# Altium PCB hat_template 2021V3.PcbDoc (part 2 of 2)
Units mm, origin at the board's own origin, x right, y up, seen from the top; angles counter-clockwise.
Board outline 64 x 85 mm, 4 copper layers (Top Side, Ground Plane, Power Plane, Bottom Side), stack 0.844 mm thick; 83 components, 57 nets, 300 pads, 72 vias.
Unrouted connection lines stored in the file: 1.
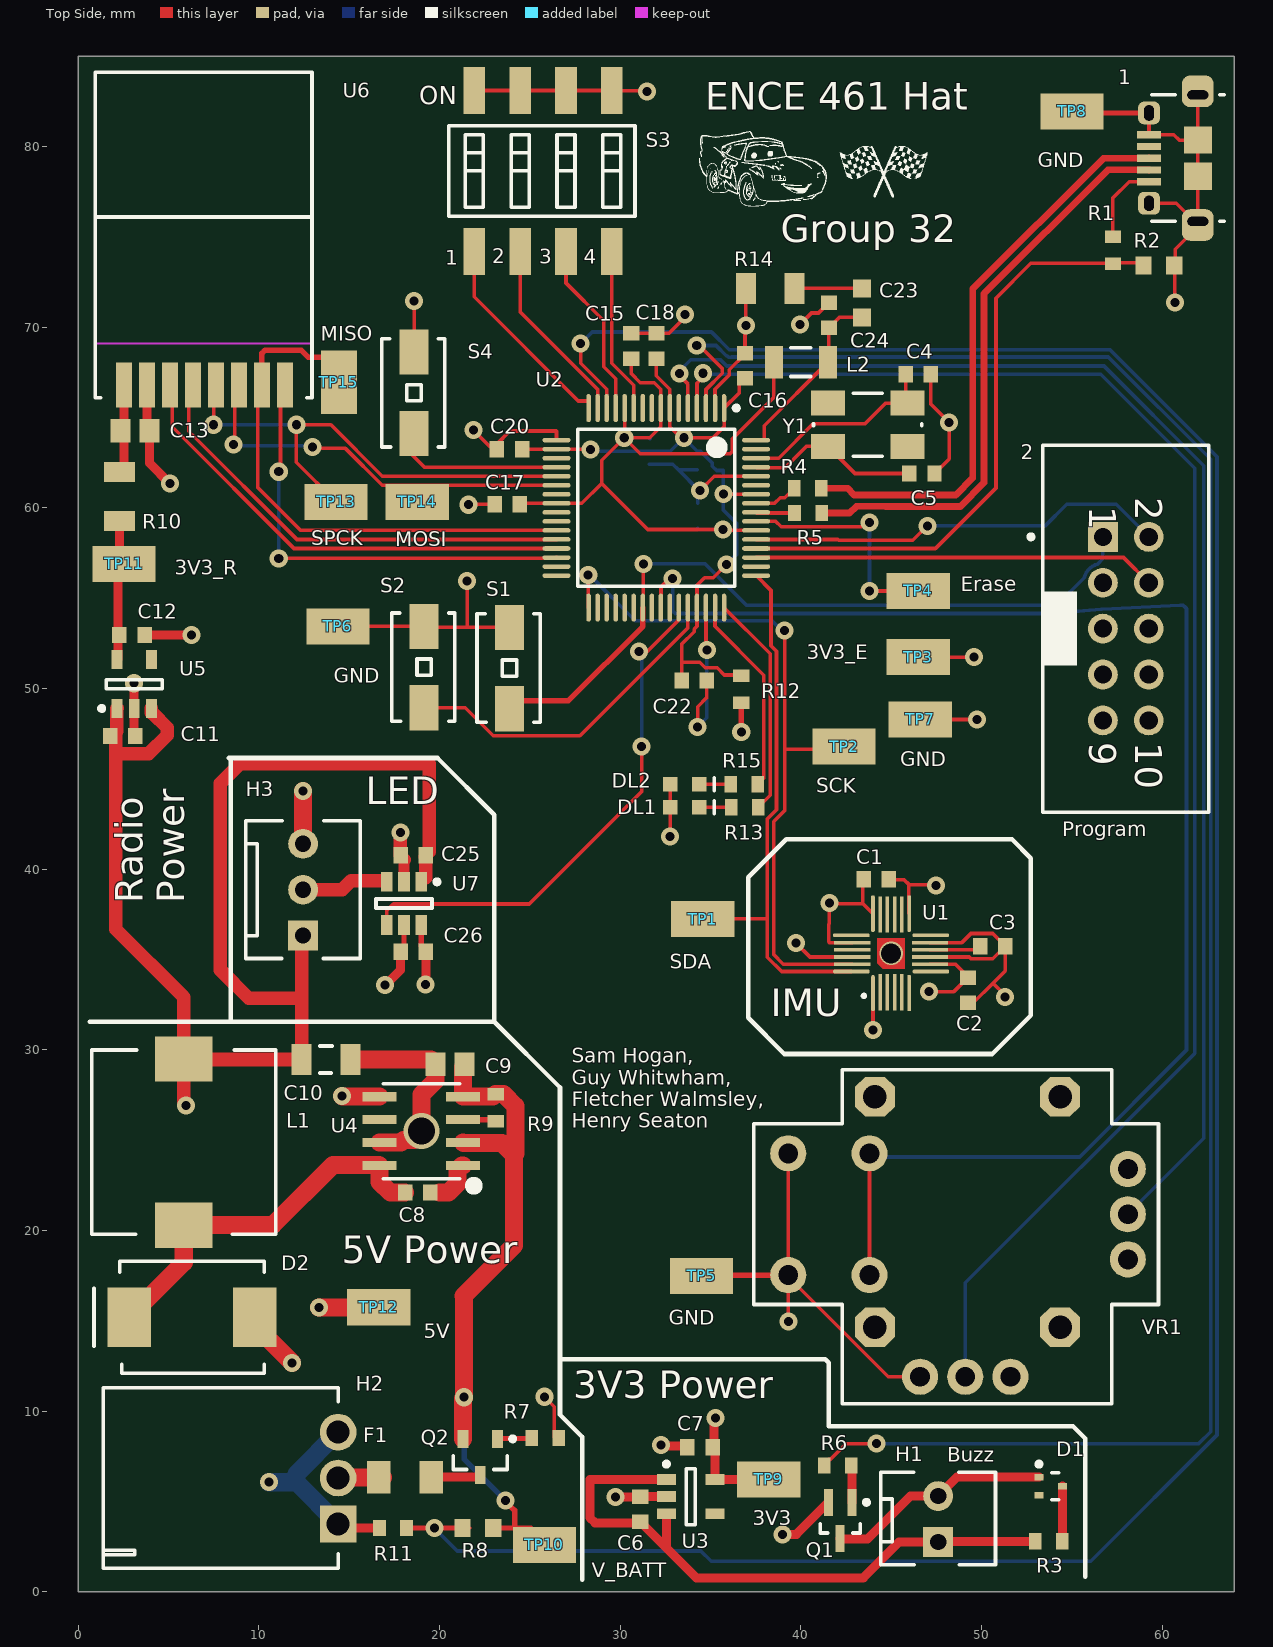
[diagram p0: Top Side view]

## Silkscreen, mask and mechanical layers (free items; w line width, h text height) (continued)
Top Overlay: (continued)
  drawing of 145 lines, arcs and shapes, not listed
  text "ENCE 461 Hat" at 34.696,82.042 h1.52
  text "Group 32" at 38.887,74.701 h1.52
  text "LED" at 15.926,43.586 h1.52
  text "Radio / Power" at 5.867,38.1 h1.52 r90
  text "IMU" at 38.329,31.852 h1.52
  text "Sam Hogan,  / Guy Whitwham,  / Fletcher Walmsley, / Henry Seaton" at 27.33,25.679 h0.8
  text "5V Power" at 14.58,18.186 h1.52
  text "3V3 Power" at 27.407,10.719 h1.52
Board Outline:
  lines w0.2: -0.2,0.1 -0.2,85.1 ; 0,0 64,0 64,85 0,85

## Dimensions
64,86 to 0,86 on Mechanical 1
65,85 to 65,0 on Mechanical 1

## Text inside footprints (layer, text, board x,y; h text height)
1: Mechanical 1 "PCB Edge" at 64.243,77.207 h0.52 r90
2: Top Overlay "9" at 55.968,47.035 h1.5 r270; Top Overlay "10" at 58.508,47.035 h1.5 r270; Top Overlay "1" at 55.968,60.094 h1.5 r270
S3: Top Overlay "4" at 27.995,73.525 h0.8; Top Overlay "3" at 25.52,73.5 h0.8; Top Overlay "2" at 22.92,73.55 h0.8; Top Overlay "1" at 20.32,73.45 h0.8; Top Overlay "ON" at 18.872,82.328 h1
U4: Mechanical 13 "*" at 20.93,24.344 h1.27 r180